# Altium PCB AMP.PcbDoc
Units mil, origin at the board's own origin, x right, y up, seen from the top; angles counter-clockwise.
Board outline 2280 x 1160 mil, 2 copper layers (Top Layer, Bottom Layer); 12 components, 8 nets, 36 pads, 0 vias.
Unrouted connection lines stored in the file: 2.
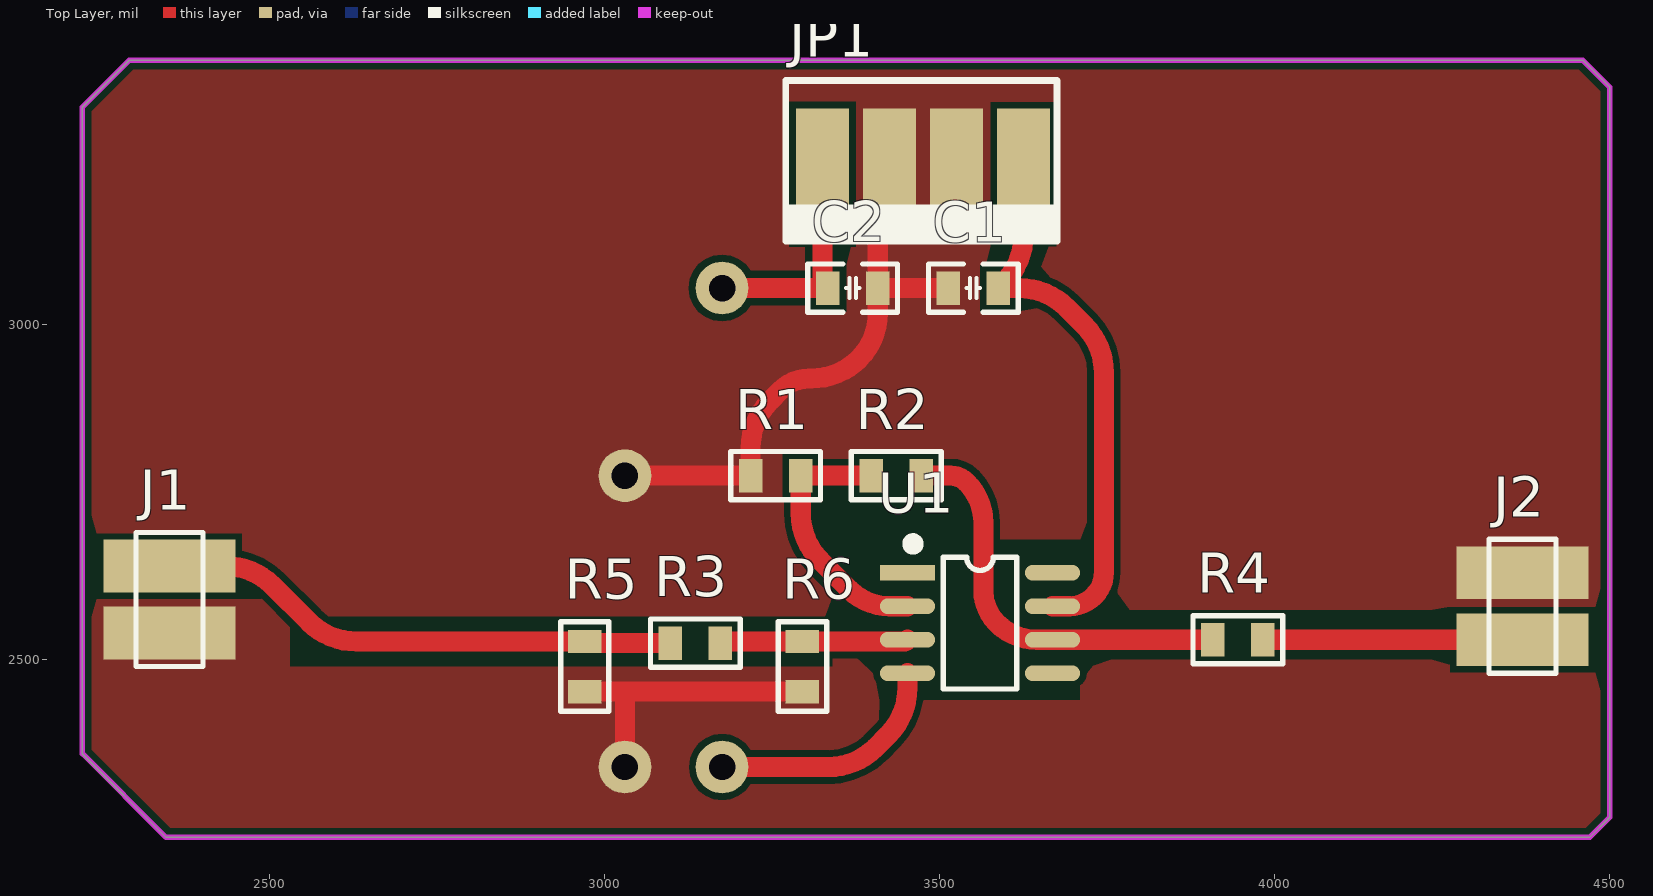
[diagram p0: Top Layer view]
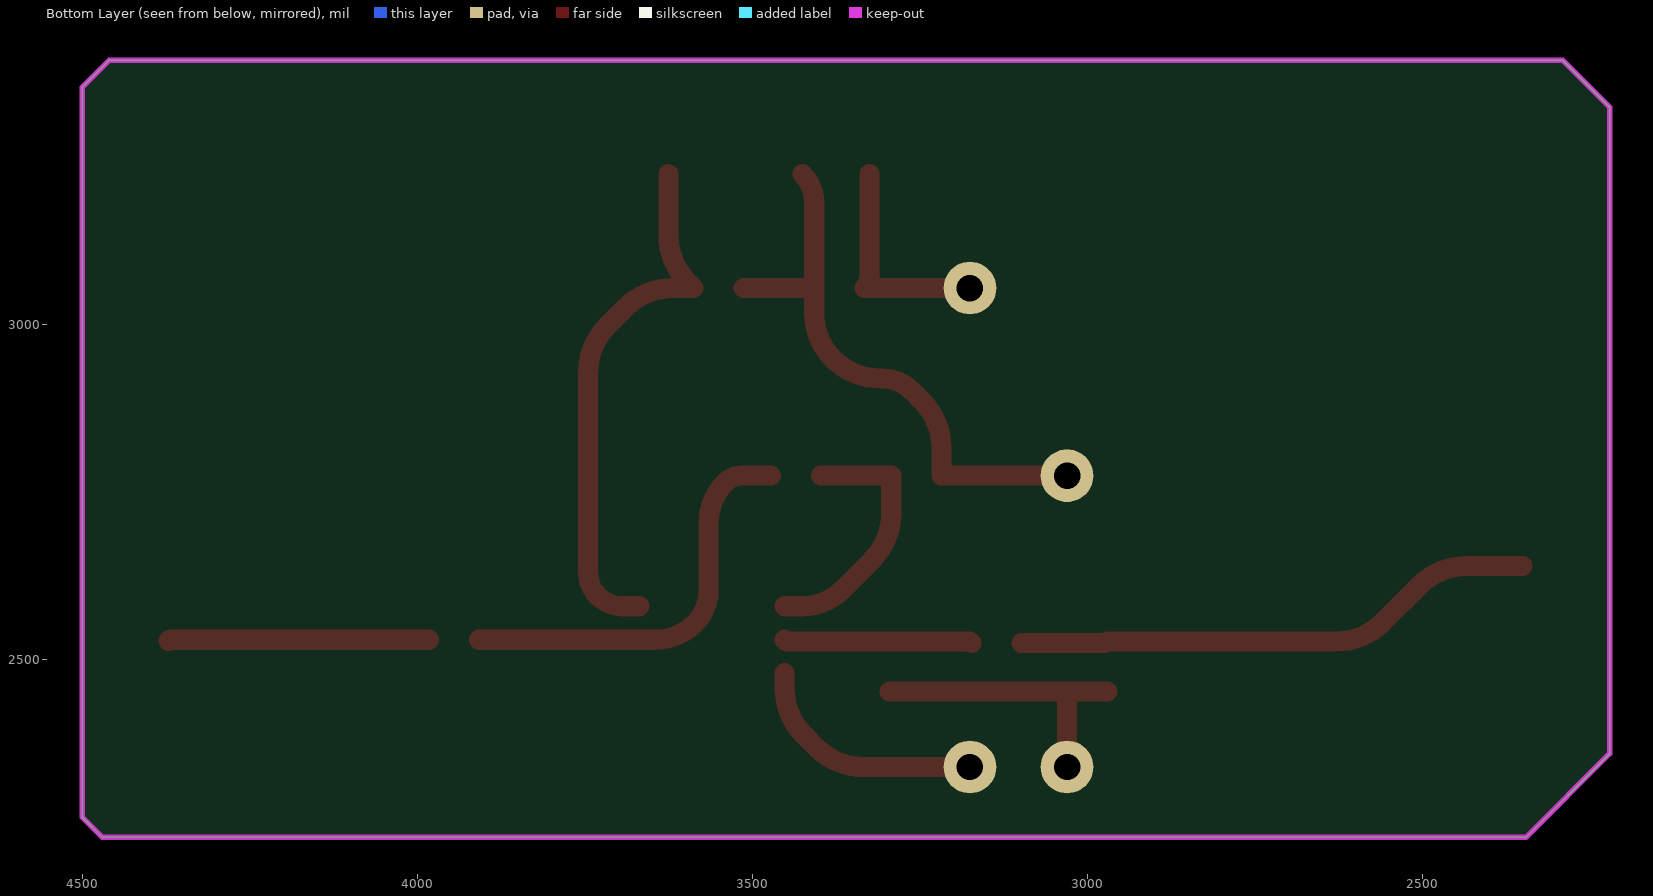
[diagram p1: Bottom Layer view, seen from below]

## Layer stack, top to bottom
Top Solder: solder mask 0.4, Solder Resist, Dk 3.5
Top Layer: signal copper 1.4
Dielectric 1: dielectric 12.6, FR-4, Dk 4.8
Bottom Layer: signal copper 1.4
Bottom Solder: solder mask 0.4, Solder Resist, Dk 3.5

## Board outline
2220,2360 2220,3325 2290,3395 4460,3395 4500,3355 4500,2265 4470,2235 2345,2235

## Design rules (kind name [scope] priority, off if disabled: settings)
Clearance [All] p1: gap=10
PlaneConnect [All] p1: planeconnectstyle=Direct reliefexpansion=20 reliefentries=4 reliefconductorwidth=10 reliefairgap=10
PolygonConnect [All] p1: connectstyle=Direct reliefconductorwidth=10 reliefentries=4 polygonreliefangle="90 Angle" airgapwidth=10
RoutingVias [All] p1: holewidth=28 width=50 viastyle="Through Hole" minholewidth=28 minwidth=50 maxholewidth=28 maxwidth=50
SolderMaskExpansion [All] p1: expansion=4
Width [All] p1: maxlimit=30 minlimit=10 preferedwidth=10 minimp=50.000000 maximp=50.000000 favimp=50.000000
29 further rules are at their usual default settings.

## Components (designator, comment, footprint, x,y, rotation, side; value= is the part's Value field where it differs from the comment)
C1 "104" "C 0805_L" 3550,3055 r0 top
C2 "104" "C 0805_L" 3370,3055 r180 top
J1 "SMA" HDR2.54-LI-2P 2350,2590 r270 top
J2 "SMA" HDR2.54-LI-2P 4370,2580 r90 top
JP1 "HDR-1X4" KF2510-LI-4P 3475,3225 r180 top
R1 "330R" "R 0805_L" 3255,2775 r0 top
R2 "1k" "R 0805_L" 3435,2775 r0 top
R3 "100R" "R 0805_L" 3135,2525 r0 top
R4 "51R" "R 0805_L" 3945,2530 r0 top
R5 "3.9k" "R 0805_L" 2970,2490 r90 top
R6 "56R" "R 0805_L" 3295,2490 r90 top
U1 "OPA" SOP8_M 3560,2555 r0 top

## Footprints (in the part's own frame and the unit in brackets; to place one, negate y for a bottom-side part, rotate by r counter-clockwise, add the part's x,y. Pads: shape width x height; smd on the part's side, far side on the other; paste and mask are expansions set on the pad)
"C 0805_L" [mil] "无极性贴片电容"
  rect 35x50 smd: 1(-37.4,0) 2(37.4,0)
  silkscreen extent -67,-36 67,36, body extent -39,-24 39,24, height 20
HDR2.54-LI-2P [mm] "排针，2脚"
  rect 2x5 smd: 1(-1.27,0) 2(1.27,0)
  silkscreen extent -2.54,-1.27 2.54,1.27, body extent -2.54,-1.27 2.54,1.27, height 8.5
KF2510-LI-4P [mm] "接插件/2A"
  rect 2x5 smd: 1(-3.81,0) 2(-1.27,0) 3(1.27,0) 4(3.81,0)
  silkscreen extent -5.08,-3.56 5.21,2.54, body extent -5.08,-3.5 5.08,2.4, height 11.05
"R 0805_L" [mil] "1/8W贴片电阻"
  rect 35x50 smd: 1(-37.4,0) 2(37.4,0)
  silkscreen extent -67,-36 67,36, body extent -39,-25 39,25, height 20
SOP8_M [mm] "5*6*1.8mm（长宽高）"
  rect 2.1x0.6 smd: 1(-2.75,1.905)
  oval 2.1x0.6 smd: 2(-2.75,0.635) 3(-2.75,-0.635) 4(-2.75,-1.905) 5(2.75,-1.905) 6(2.75,-0.635) 7(2.75,0.635) 8(2.75,1.905)
  silkscreen extent -2.69,-2.5 1.4,3.15, body extent -3,-2.5 3,2.5, height 1.9

## Part data
C1 C2: library part C, "无极性贴片电容"
JP1: library part "Header 4", "4P接插件"
R1 R2 R3 R4 R5 R6: library part R, "贴片电阻"
U1: library part 单运放

## Free pads (board coordinates)
  round 78.74 hole 39.37: 0(3175,3055) 1(3175,2340) 2(3030,2775) 3(3030,2340)

## Nets (pads, with @x,y where several pads share a name; then routed paths per layer and width w, separated by ;. In a path a pad name is that pad's centre, name@x,y a point inside that pad or via, vN(x,y) a via of type N, cw(c..) or ccw(c..) an arc to the next point about the centre after c; other vN are vias at no path point)
GND: C1.1 C2.1 J1.2 J2.2 JP1.2 JP1.3 pad.2 pad.3 R1.1 R5.1 R6.1 | length 1290.7
  Top Layer w30: R5.1 3035,2452.6 ; pad.3 3030,2440.52 cw(c3047.07,2440.52) 3035,2452.6 ; pad.2 R1.1 3217.6,2816.17 cw(c3317.6,2816.17) 3246.88,2886.88 3262.32,2902.32 cw(c3305,2859.64) 3305,2920 3308.58,2920 ccw(c3308.58,3020) 3379.29,2949.29 ccw(c3311.41,3017.17) 3407.4,3017.17 C2.1 ; R6.1 3035,2452.6 ; JP1.3 ccw(c3467.48,3182.52) 3407.4,3182.52 C2.1 ; C1.1 C2.1
NetJ1_1: J1.1 R3.1 R5.2 | length 786.3
  Top Layer w30: J1.1 2433.58,2640 cw(c2433.58,2540) 2504.29,2610.71 2558.31,2556.69 ccw(c2629.02,2627.4) 2629.02,2527.4 R5.2 ccw(c2975.8,2533.2) 2975.8,2525 R3.1
NetJ2_1: J2.1 R4.2 | length 389.6
  Top Layer w30: R4.2 4367.78,2530 cw(c4367.78,2524.63) J2.1@4371.57,2528.43
NetR1_2: R1.2 R2.1 U1.2 | length 394.4
  Top Layer w30: R2.1 R1.2 3292.4,2719.02 ccw(c3392.4,2719.02) 3321.69,2648.31 3365,2605 ccw(c3425.36,2665.36) 3425.36,2580 U1.2
NetR2_2: R2.2 R4.1 U1.6 | length 621.6
  Top Layer w30: R2.2 3515.87,2775 cw(c3515.87,2740.87) 3540,2765 cw(c3479.64,2704.64) 3565,2704.64 3565,2603.28 ccw(c3633.28,2603.28) 3585,2555 ccw(c3645.36,2615.36) 3645.36,2530 U1.6 R4.1
NetR3_2: R3.2 R6.2 U1.3 | length 280.7
  Top Layer w30: R3.2 cw(c3178.2,2519.2) 3178.2,2527.4 R6.2 3445.45,2527.4 ccw(c3445.45,2536.28) U1.3
VCC: C1.2 JP1.1 U1.7 | length 810.2
  Top Layer w30: JP1.1 3625,3134.02 cw(c3525,3134.02) 3595.71,3063.31 C1.2 3618.58,3055 cw(c3618.58,2955) 3689.29,3025.71 3715.71,2999.29 cw(c3645,2928.58) 3745,2928.58 3745,2631.21 cw(c3693.79,2631.21) 3730,2595 cw(c3693.79,2631.21) 3693.79,2580 U1.7
VEE: C2.2 JP1.4 pad.0 pad.1 U1.4 | length 692.8
  Top Layer w30: pad.1 3333.58,2340 ccw(c3333.58,2440) 3404.29,2369.29 3422.44,2387.44 ccw(c3351.73,2458.15) 3451.73,2458.15 U1.4 ; pad.0 C2.2 cw(c3350.95,3073.36) 3325,3073.36 JP1.4
pads on no net: U1.1 U1.5 U1.8

## Polygon pours and split planes (outlines as drawn)
GND on Top Layer "Keep-Out Layer-No Net" (solid, remove dead copper, pour order 6): 2150,2110 2175.71,2135.71 cw(c2246.42,2065) 2246.42,2165 4720,2165 4720,3393.58 ccw(c4620,3393.58) 4690.71,3464.29 4580,3575 4524.29,3519.29 cw(c4453.58,3590) 4453.58,3490 2030,3490

## Keep-outs
Keep-Out Layer:
  lines w8: 2220,2360 2220,3325 2290,3395 2435,3395 4460,3395 4500,3355 4500,2265 4470,2235 2345,2235 2220,2360

## Other copper
Top Layer:
  pour cut-out: 3410,2440 3710,2440 3710,2680 3410,2680
  pour cut-out: 3755,2575 4235,2575 4235,2500 3755,2500
  pour cut-out: 2530,2565 3340,2565 3340,2490 2530,2490